# EAGLE board ODU Display (EAGLE 9.6.2)
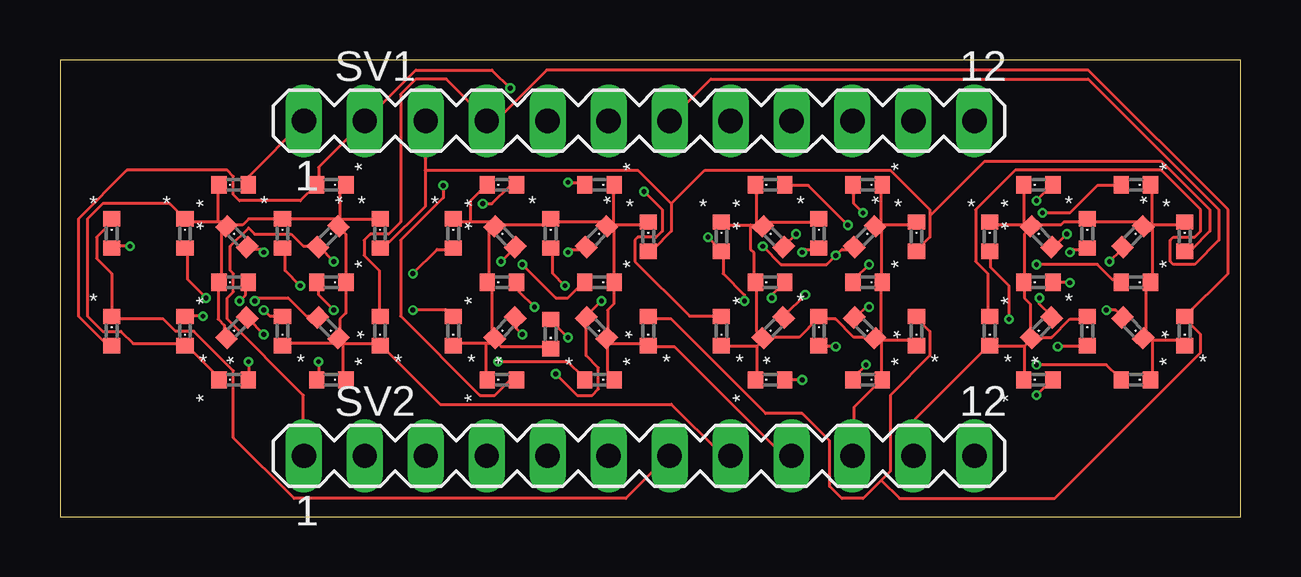
[diagram p0: board, top side]
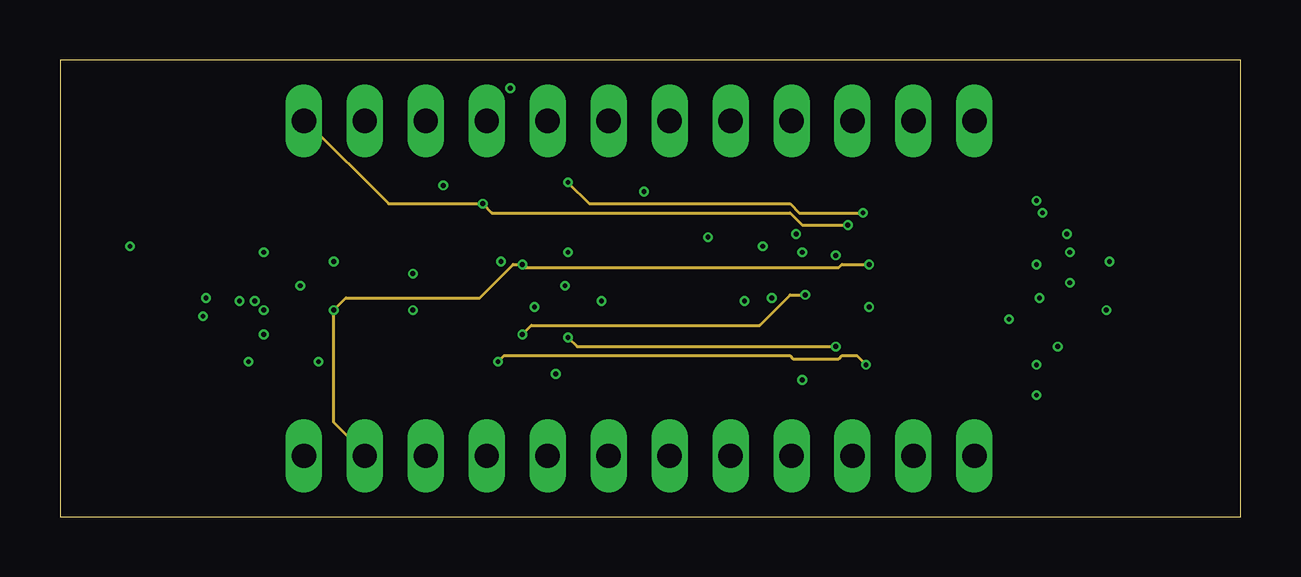
[diagram p1: board, inner layer Route2]
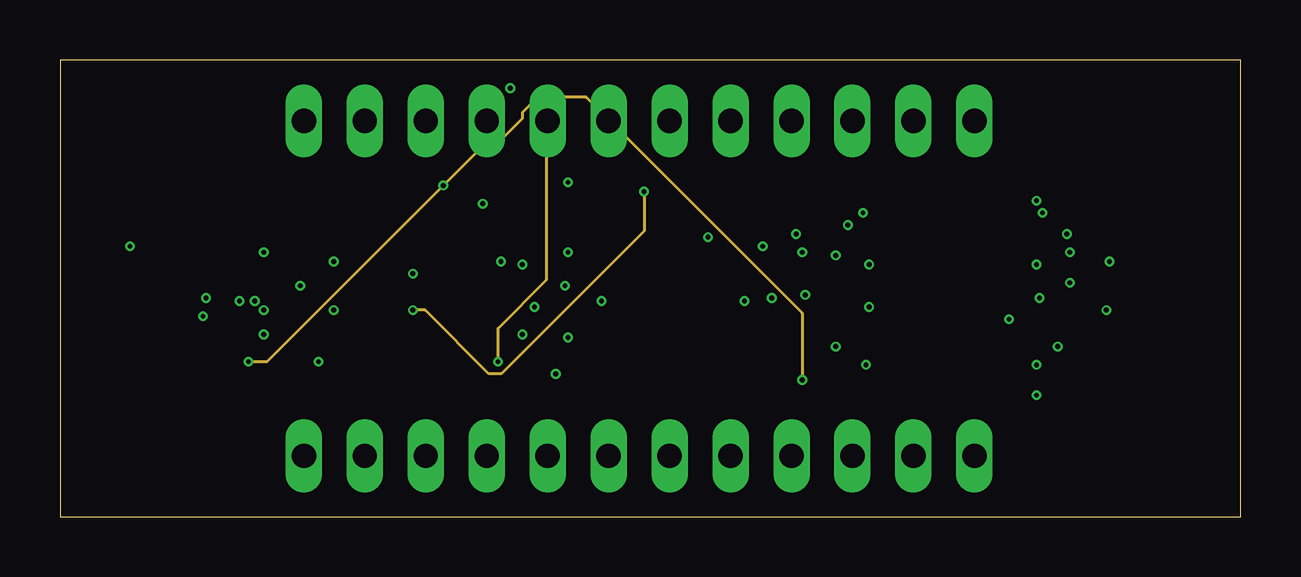
[diagram p2: board, inner layer Route15]
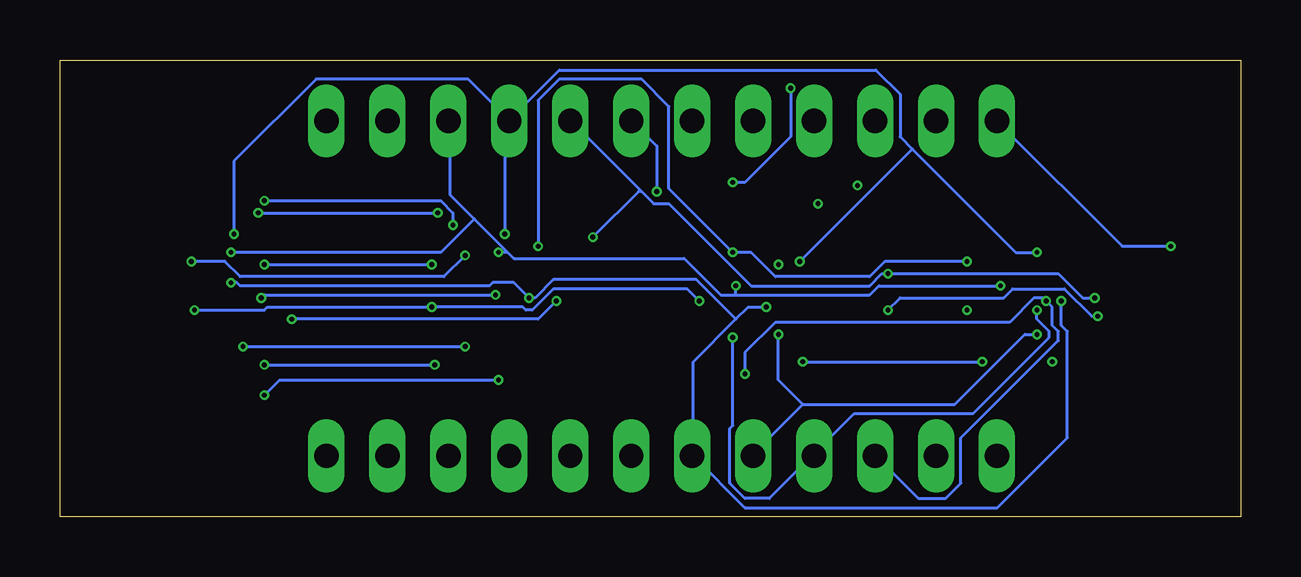
[diagram p3: board, bottom side, seen from below]

Size 49.2 x 19.05 mm. Coordinates in mm from the lower left corner, seen from the top.
Outline: 0,0 49.2,0 49.2,19.05 0,19.05 0,0
Copper layers (1*2*15*16): Top 0.035559375mm / dielectric 0.17018125mm / Route2 0.01778125mm / dielectric 47mil / Route15 0.01778125mm / dielectric 0.17018125mm / Bottom 0.035559375mm
Design rules "jlcpcb-4-layer": minimum track width 5mil, minimum drill 0.2mm, track to track 0.126490625mm, track to pad 0.126490625mm, pad to pad 0.126490625mm, via to via 0.126490625mm, smd to smd 0mil, copper to edge 0.1mm, drill to drill 5mil, minimum pad ring 4mil, minimum via ring 4mil, stop-mask expansion 3mil, vias tented up to drill 100mil, thermal gap 10mil

## Footprints (pad centres in the part's own frame; a part is rotated, then mirrored left to right if it is on the bottom)
CHIPLED_0402 = smd 0.711 x 0.635: A 0,-0.61; C 0,0.61
MA12-1 = drill 1.016 long: 1 -13.97,0; 2 -11.43,0; 3 -8.89,0; 4 -6.35,0; 5 -3.81,0; 6 -1.27,0; 7 1.27,0; 8 3.81,0; 9 6.35,0; 10 8.89,0; 11 11.43,0; 12 13.97,0

## Placement (x,y rotation side)
LED_A1  [CHIPLED_0402]  7.24,13.84 90 top
LED_A2  [CHIPLED_0402]  18.41,13.84 90 top
LED_A3  [CHIPLED_0402]  29.59,13.84 90 top
LED_A4  [CHIPLED_0402]  40.77,13.84 90 top
LED_B1  [CHIPLED_0402]  11.3,13.84 270 top
LED_B2  [CHIPLED_0402]  22.48,13.84 270 top
LED_B3  [CHIPLED_0402]  33.66,13.84 270 top
LED_B4  [CHIPLED_0402]  44.83,13.84 270 top
LED_C1  [CHIPLED_0402]  13.34,11.81 0 top
LED_C2  [CHIPLED_0402]  24.51,11.68 0 top
LED_C3  [CHIPLED_0402]  35.69,11.68 0 top
LED_C4  [CHIPLED_0402]  46.86,11.68 0 top
LED_D1  [CHIPLED_0402]  13.34,7.75 180 top
LED_D2  [CHIPLED_0402]  24.51,7.75 180 top
LED_D3  [CHIPLED_0402]  35.69,7.75 180 top
LED_D4  [CHIPLED_0402]  46.86,7.75 180 top
LED_E1  [CHIPLED_0402]  11.3,5.71 270 top
LED_E2  [CHIPLED_0402]  22.48,5.71 270 top
LED_E3  [CHIPLED_0402]  33.66,5.71 270 top
LED_E4  [CHIPLED_0402]  44.83,5.71 270 top
LED_F1  [CHIPLED_0402]  7.24,5.71 90 top
LED_F2  [CHIPLED_0402]  18.41,5.71 90 top
LED_F3  [CHIPLED_0402]  29.59,5.71 90 top
LED_F4  [CHIPLED_0402]  40.77,5.71 90 top
LED_G1  [CHIPLED_0402]  5.21,7.75 180 top
LED_G2  [CHIPLED_0402]  16.38,7.75 180 top
LED_G3  [CHIPLED_0402]  27.56,7.75 180 top
LED_G4  [CHIPLED_0402]  38.73,7.75 180 top
LED_H1  [CHIPLED_0402]  5.21,11.81 0 top
LED_H2  [CHIPLED_0402]  16.38,11.81 0 top
LED_H3  [CHIPLED_0402]  27.56,11.68 0 top
LED_H4  [CHIPLED_0402]  38.73,11.68 0 top
LED_K1  [CHIPLED_0402]  7.37,11.68 45 top
LED_K2  [CHIPLED_0402]  18.54,11.68 45 top
LED_K3  [CHIPLED_0402]  29.72,11.68 45 top
LED_K4  [CHIPLED_0402]  40.89,11.68 45 top
LED_M1  [CHIPLED_0402]  9.27,11.81 0 top
LED_M2  [CHIPLED_0402]  20.45,11.81 0 top
LED_M3  [CHIPLED_0402]  31.62,11.81 0 top
LED_M4  [CHIPLED_0402]  42.8,11.81 0 top
LED_N1  [CHIPLED_0402]  11.18,11.68 315 top
LED_N2  [CHIPLED_0402]  22.35,11.68 315 top
LED_N3  [CHIPLED_0402]  33.53,11.68 315 top
LED_N4  [CHIPLED_0402]  44.7,11.68 315 top
LED_P1  [CHIPLED_0402]  11.3,9.78 270 top
LED_P2  [CHIPLED_0402]  22.48,9.78 270 top
LED_P3  [CHIPLED_0402]  33.66,9.78 270 top
LED_P4  [CHIPLED_0402]  44.83,9.78 270 top
LED_R1  [CHIPLED_0402]  11.18,7.87 225 top
LED_R2  [CHIPLED_0402]  22.35,7.87 225 top
LED_R3  [CHIPLED_0402]  33.53,7.87 225 top
LED_R4  [CHIPLED_0402]  44.7,7.87 225 top
LED_S1  [CHIPLED_0402]  9.27,7.75 180 top
LED_S2  [CHIPLED_0402]  20.45,7.62 180 top
LED_S3  [CHIPLED_0402]  31.62,7.75 0 top
LED_S4  [CHIPLED_0402]  42.8,7.75 0 top
LED_SEL1  [CHIPLED_0402]  2.16,11.81 0 top
LED_SEL2  [CHIPLED_0402]  2.16,7.75 0 top
LED_T1  [CHIPLED_0402]  7.37,7.87 135 top
LED_T2  [CHIPLED_0402]  18.54,7.87 135 top
LED_T3  [CHIPLED_0402]  29.72,7.87 135 top
LED_T4  [CHIPLED_0402]  40.89,7.87 135 top
LED_U1  [CHIPLED_0402]  7.24,9.78 90 top
LED_U2  [CHIPLED_0402]  18.41,9.78 90 top
LED_U3  [CHIPLED_0402]  29.59,9.78 90 top
LED_U4  [CHIPLED_0402]  40.77,9.78 90 top
SV1  [MA12-1]  24.13,16.51 0 top
SV2  [MA12-1]  24.13,2.54 0 top

## Library data of the parts
LED_A1-LED_A4 LED_B1-LED_B4 LED_C1-LED_C4 LED_D1-LED_D4 LED_E1-LED_E4 LED_F1-LED_F4 LED_G1-LED_G4 LED_H1-LED_H4 LED_K1-LED_K4 LED_M1-LED_M4 LED_N1-LED_N4 LED_P1-LED_P4 LED_R1-LED_R4 LED_S1-LED_S4 LED_SEL1 LED_SEL2 LED_T1-LED_T4 LED_U1-LED_U4 = 000_nl2
SV1 SV2 = con-lstb; OC_FARNELL: unknown; OC_NEWARK: unknown

## Nets
K0: LED_SEL1.C LED_SEL2.C SV2.7
K1: LED_A1.C LED_B1.C LED_C1.C LED_D1.C LED_E1.C LED_F1.C LED_G1.C LED_H1.C LED_K1.C LED_M1.C LED_N1.C LED_P1.C LED_R1.C LED_S1.C LED_T1.C LED_U1.C SV2.8
K2: LED_A2.C LED_B2.C LED_C2.C LED_D2.C LED_E2.C LED_F2.C LED_G2.C LED_H2.C LED_K2.C LED_M2.C LED_N2.C LED_P2.C LED_R2.C LED_S2.C LED_T2.C LED_U2.C SV2.9
K3: LED_A3.C LED_B3.C LED_C3.C LED_D3.C LED_E3.C LED_F3.C LED_G3.C LED_H3.C LED_K3.C LED_M3.C LED_N3.C LED_P3.C LED_R3.C LED_S3.C LED_T3.C LED_U3.C SV2.10
K4: LED_A4.C LED_B4.C LED_C4.C LED_D4.C LED_E4.C LED_F4.C LED_G4.C LED_H4.C LED_K4.C LED_M4.C LED_N4.C LED_P4.C LED_R4.C LED_S4.C LED_T4.C LED_U4.C SV2.11
K5: SV2.12
SEG_A: LED_A1.A LED_A2.A LED_A3.A LED_A4.A LED_SEL1.A SV1.1
SEG_B: LED_B1.A LED_B2.A LED_B3.A LED_B4.A LED_SEL2.A SV1.2
SEG_C: LED_C1.A LED_C2.A LED_C3.A LED_C4.A SV1.3
SEG_D: LED_D1.A LED_D2.A LED_D3.A LED_D4.A SV1.4
SEG_E: LED_E1.A LED_E2.A LED_E3.A LED_E4.A SV1.5
SEG_F: LED_F1.A LED_F2.A LED_F3.A LED_F4.A SV1.6
SEG_G: LED_G1.A LED_G2.A LED_G3.A LED_G4.A SV1.7
SEG_H: LED_H1.A LED_H2.A LED_H3.A LED_H4.A SV1.8
SEG_K: LED_K1.A LED_K2.A LED_K3.A LED_K4.A SV1.9
SEG_M: LED_M1.A LED_M2.A LED_M3.A LED_M4.A SV1.10
SEG_N: LED_N1.A LED_N2.A LED_N3.A LED_N4.A SV2.1
SEG_P: LED_P1.A LED_P2.A LED_P3.A LED_P4.A SV2.2
SEG_R: LED_R1.A LED_R2.A LED_R3.A LED_R4.A SV2.3
SEG_S: LED_S1.A LED_S2.A LED_S3.A LED_S4.A SV2.4
SEG_T: LED_T1.A LED_T2.A LED_T3.A LED_T4.A SV2.5
SEG_U: LED_U1.A LED_U2.A LED_U3.A LED_U4.A SV2.6

## Tracks (layer width: path | path; a pad name or v marks a point on that pad's centre or on a via)
K0
  Top 0.127: LED_SEL1.C 2.15,12.29 1.52,11.66 1.52,10.77 2.15,10.14 LED_SEL2.C 2.28,8.24 4.31,8.24 4.82,7.73 5.58,7.73 7.22,6.08 7.22,3.29 9.76,0.76 23.57,0.76 25.35,2.54 SV2.7
K1
  Top 0.127: LED_F1.C 6.59,5.83 5.32,7.1 LED_G1.C 5.2,7.22 3.04,7.22 2.54,7.73 1.77,7.73 1.14,8.37 1.14,12.42 1.77,13.05 4.56,13.05 5.2,12.42 LED_H1.C 5.32,12.29 6.59,12.29 | LED_K1.C 6.84,12.04 6.72,11.91 6.72,9.89 LED_U1.C 6.59,9.76 6.59,8.24 6.84,7.99 6.84,7.48 LED_T1.C | 6.59,12.29 6.72,12.29 6.84,12.17 LED_K1.C | 6.59,12.29 6.59,13.81 LED_A1.C | LED_S1.C 9.38,7.22 11.41,7.22 11.53,7.35 LED_R1.C | 11.79,7.22 11.79,5.83 LED_E1.C | 11.79,7.22 11.66,7.35 LED_R1.C | 11.79,7.22 13.31,7.22 LED_D1.C 13.44,7.1 15.84,4.69 25.48,4.69 27.5,2.66 27.88,2.66 SV2.8 | 11.79,7.22 LED_R1.C | 11.66,12.42 11.66,13.69 11.79,13.81 LED_B1.C | 11.66,12.42 11.66,12.17 LED_N1.C | 11.66,12.42 9.38,12.42 LED_M1.C 9.25,12.42 7.86,12.42 7.61,12.17 6.97,12.17 LED_K1.C | LED_N1.C 11.66,12.04 11.91,11.79 11.91,9.89 LED_P1.C 11.91,9.76 11.91,8.49 11.66,8.24 11.66,7.48 LED_R1.C | 11.66,12.42 13.31,12.42 LED_C1.C | 11.66,12.42 LED_N1.C
K2
  Top 0.127: 17.74,7.22 17.87,7.22 18,7.35 LED_T2.C | 17.74,7.22 16.48,7.22 LED_G2.C | 17.74,7.22 17.74,5.83 LED_F2.C | LED_S2.C 20.41,7.1 18.38,7.1 18.12,7.35 LED_T2.C | LED_K2.C 18,12.04 17.87,11.91 17.87,9.89 LED_U2.C 17.87,9.76 18,9.63 18,7.48 LED_T2.C | 17.11,12.29 17.87,12.29 18,12.17 LED_K2.C | 17.11,12.29 16.48,12.29 LED_H2.C | 17.11,12.29 17.11,13.18 17.74,13.81 LED_A2.C | 22.81,7.22 22.81,6.08 23.07,5.83 LED_E2.C | 22.81,7.22 22.81,7.35 LED_R2.C | 22.81,7.22 24.46,7.22 LED_D2.C 24.59,7.1 25.6,7.1 30.04,2.66 30.42,2.66 SV2.9 | 22.81,7.22 LED_R2.C | 23.07,12.17 24.46,12.17 LED_C2.C | 23.07,12.17 22.81,12.17 LED_N2.C | LED_N2.C 22.69,12.17 22.56,12.29 20.53,12.29 LED_M2.C 20.41,12.29 20.28,12.17 18.12,12.17 LED_K2.C | 23.07,12.17 23.07,9.89 LED_P2.C 23.07,9.76 23.07,8.87 22.81,8.62 22.81,7.48 LED_R2.C | 23.07,12.17 23.07,13.81 LED_B2.C | 23.07,12.17 LED_N2.C
K3
  Top 0.127: 29.02,7.1 29.02,5.83 LED_F3.C | 29.02,7.1 29.28,7.35 LED_T3.C | 29.02,7.1 27.63,7.1 LED_G3.C | LED_T3.C 29.28,7.48 29.02,7.73 29.02,9.76 LED_U3.C 28.9,9.89 28.9,11.03 28.77,11.15 28.77,12.17 | 28.77,12.17 27.63,12.17 LED_H3.C | 28.77,12.17 29.02,12.17 | 29.02,12.17 29.28,12.17 LED_K3.C | 29.02,12.17 29.02,13.81 LED_A3.C | 29.02,12.17 LED_K3.C | LED_M3.C 31.56,12.29 29.53,12.29 29.41,12.17 LED_K3.C | 34.22,12.17 35.62,12.17 LED_C3.C | 34.22,12.17 33.97,12.17 LED_N3.C 34.22,12.17 | 34.22,12.17 34.22,9.89 LED_P3.C 34.22,9.76 34.22,7.35 | 34.22,12.17 34.22,13.81 LED_B3.C | 34.22,7.35 35.49,7.35 35.62,7.22 LED_D3.C | 34.22,7.35 33.97,7.35 LED_R3.C | 34.22,7.35 34.22,5.83 LED_E3.C 34.22,5.7 33.08,4.56 33.08,2.66 SV2.10 | LED_R3.C 33.84,7.48 33.08,7.48 32.32,8.24 31.69,8.24 LED_S3.C 31.56,8.24 30.8,7.48 29.41,7.48 LED_T3.C | 34.22,7.35 LED_R3.C
K4
  Top 0.127: 40.18,7.1 40.18,5.83 LED_F4.C | 40.18,7.1 40.43,7.35 LED_T4.C | 40.18,7.1 38.78,7.1 LED_G4.C 38.66,7.1 35.62,4.06 35.62,2.66 SV2.11 | LED_S4.C 42.71,8.24 42.08,8.24 41.32,7.48 40.56,7.48 LED_T4.C | LED_K4.C 40.43,12.04 40.18,11.79 40.18,9.89 LED_U4.C 40.18,9.76 40.18,9.13 40.43,8.87 40.43,7.48 LED_T4.C | 40.18,12.17 40.43,12.17 LED_K4.C | 40.18,12.17 38.78,12.17 LED_H4.C | 40.18,12.17 40.18,13.81 LED_A4.C | 40.18,12.17 LED_K4.C | 45.5,7.35 46.64,7.35 46.77,7.22 LED_D4.C | 45.5,7.35 45.25,7.35 LED_R4.C 45.25,7.48 45.25,9.63 45.37,9.76 LED_P4.C 45.5,9.89 45.5,12.17 | 45.5,7.35 45.5,5.83 LED_E4.C | 45.5,12.17 46.77,12.17 LED_C4.C | 45.5,12.17 45.25,12.17 LED_N4.C | LED_N4.C 45.12,12.17 44.99,12.29 42.84,12.29 LED_M4.C 42.71,12.29 41.83,12.29 41.7,12.17 40.56,12.17 LED_K4.C | 45.5,12.17 45.5,13.81 LED_B4.C | 45.5,12.17 LED_N4.C
SEG_A  (via drill 0.2)
  Top 0.127: v32.83,12.17 31.18,13.81 30.29,13.81 LED_A3.A | v40.69,13.18 41.32,13.81 LED_A4.A | v2.92,11.28 2.28,11.28 LED_SEL1.A | LED_A1.A 7.86,13.94 7.86,14.2 10.14,16.48 SV1.1 | v17.62,13.05 18,13.05 18.76,13.81 19.01,13.81 LED_A2.A
  Route2 0.127: SV1.1 10.27,16.48 13.69,13.05 v17.62,13.05 18,12.67 30.42,12.67 30.93,12.17 v32.83,12.17
  Bottom 0.127: v32.83,12.17 32.83,12.67 33.33,13.18 v40.69,13.18 | v2.92,11.28 4.94,11.28 10.14,16.48 SV1.1
SEG_B  (via drill 0.2)
  Top 0.127: LED_SEL2.A 2.15,7.22 1.9,7.22 0.76,8.37 0.76,12.42 2.79,14.45 6.97,14.45 7.22,14.2 7.22,13.44 7.48,13.18 10.01,13.18 10.65,13.81 LED_B1.A 10.77,13.94 10.77,14.58 12.67,16.48 SV1.2 12.8,16.6 14.83,18.63 18,18.63 v18.76,17.87 | v33.46,12.67 33.08,13.05 33.08,13.81 LED_B3.A | v40.94,12.67 42.08,12.67 43.22,13.81 44.11,13.81 LED_B4.A | v21.17,13.94 21.8,13.94 LED_B2.A
  Route2 0.127: v33.46,12.67 30.8,12.67 30.42,13.05 22.05,13.05 v21.17,13.94
  Bottom 0.127: v40.94,12.67 v33.46,12.67 | v21.17,13.94 20.66,13.94 18.76,15.84 v18.76,17.87
SEG_C
  Top 0.127: 15.21,14.45 15.21,16.48 SV1.3 | 15.21,14.45 15.21,12.93 13.56,11.28 13.44,11.28 LED_C1.A | 25.48,13.05 25.48,11.91 24.71,11.15 24.59,11.15 LED_C2.A | 25.48,13.05 24.08,14.45 15.21,14.45 | 36.25,12.55 36.25,12.8 34.6,14.45 26.87,14.45 25.48,13.05 | 36.25,12.55 36.25,11.66 35.74,11.15 LED_C3.A | 36.25,12.55 38.53,14.83 45.88,14.83 47.91,12.8 47.91,11.91 47.15,11.15 46.9,11.15 LED_C4.A
SEG_D
  Top 0.127: LED_D1.A 13.31,8.37 13.31,10.27 12.67,10.9 12.67,11.53 12.93,11.79 13.69,11.79 14.2,12.29 14.2,17.62 14.83,18.25 16.1,18.25 17.74,16.6 SV1.4 17.87,16.6 18.25,16.6 20.28,18.63 42.84,18.63 48.67,12.8 48.67,10.14 46.9,8.37 LED_D4.A 46.9,8.24 47.53,7.61 47.53,6.84 41.45,0.76 34.98,0.76 34.22,1.52 | 34.22,1.52 34.6,1.9 34.6,5.07 36.25,6.72 36.25,7.73 35.74,8.24 LED_D3.A | 34.22,1.52 33.46,0.76 32.57,0.76 32.07,1.27 32.07,3.17 30.93,4.31 29.41,4.31 25.48,8.24 24.59,8.24 LED_D2.A
SEG_E  (via drill 0.2)
  Top 0.127: v33.59,6.34 33.08,5.83 LED_E3.A | v40.69,6.34 43.6,6.34 44.11,5.83 LED_E4.A | v10.77,6.46 10.77,5.83 LED_E1.A | v18.25,6.46 21.17,6.46 21.8,5.83 LED_E2.A
  Route2 0.127: v33.59,6.34 33.21,6.72 32.57,6.72 32.45,6.59 30.55,6.59 30.42,6.72 18.5,6.72 v18.25,6.46
  Route15 0.127: v18.25,6.46 18.25,7.86 20.28,9.89 20.28,16.48 SV1.5
  Bottom 0.127: v40.69,6.34 v33.59,6.34 | v18.25,6.46 v10.77,6.46
SEG_F  (via drill 0.2)
  Top 0.127: v30.93,5.7 30.29,5.7 LED_F3.A | v40.69,5.07 41.32,5.7 LED_F4.A | v7.86,6.46 7.86,5.83 LED_F1.A | v15.97,13.81 15.97,13.31 14.2,11.53 14.2,8.37 17.49,5.07 18.12,5.07 18.76,5.7 LED_F2.A
  Route15 0.127: v7.86,6.46 8.62,6.46 v15.97,13.81 17.62,15.46 18.12,15.46 19.27,16.6 19.27,16.86 19.9,17.49 21.93,17.49 22.81,16.6 SV1.6 22.94,16.48 30.93,8.49 v30.93,5.7
  Bottom 0.127: v30.93,5.7 40.05,5.7 v40.69,5.07
SEG_G  (via drill 0.2)
  Top 0.127: v5.96,8.37 5.32,8.37 LED_G1.A | v14.7,8.62 16.1,8.62 16.35,8.37 LED_G2.A | v24.34,13.56 25.09,12.8 25.09,11.91 24.84,11.66 24.08,11.66 23.95,11.53 23.95,10.65 26.24,8.37 27.5,8.37 LED_G3.A | LED_G4.A 38.66,8.37 38.66,10.14 38.15,10.65 38.15,12.8 39.8,14.45 45.88,14.45 47.53,12.8 47.53,11.91 47.27,11.66 46.39,11.66 46.26,11.53 46.26,10.65 46.39,10.52 47.27,10.52 48.29,11.53 48.29,12.8 42.84,18.25 27.12,18.25 25.48,16.6 SV1.7
  Route15 0.127: v14.7,8.62 15.21,8.62 17.87,5.96 18.38,5.96 24.34,11.91 v24.34,13.56
  Bottom 0.127: v5.96,8.37 6.21,8.37 7.35,9.51 9.51,9.51 9.89,9.13 14.2,9.13 v14.7,8.62 | v24.34,13.56 24.34,15.46 25.35,16.48 SV1.7
SEG_H  (via drill 0.2)
  Top 0.127: v6.08,9.13 5.32,9.89 5.32,11.15 LED_H1.A | v14.7,10.14 15.72,11.15 16.35,11.15 LED_H2.A | v27,11.66 27.5,11.15 LED_H3.A 27.63,11.03 27.63,10.14 28.52,9.25 v28.52,9 | v39.54,8.24 39.54,9.63 38.78,10.39 38.78,11.03 LED_H4.A
  Bottom 0.127: v6.08,9.13 6.59,9.13 7.61,10.14 v14.7,10.14 14.96,10.14 15.46,9.63 20.41,9.63 23.83,13.05 24.46,13.05 24.97,13.56 | 24.97,13.56 27.88,16.48 SV1.8 | v27,11.66 25.09,13.56 24.97,13.56 | v39.54,8.24 29.28,8.24 v28.52,9
SEG_K  (via drill 0.2)
  Top 0.127: v8.49,11.03 8.37,11.15 7.86,11.15 LED_K1.A | v18.38,10.65 18.89,11.15 LED_K2.A | v30.67,11.79 30.16,11.28 LED_K3.A | v41.95,11.79 41.45,11.28 LED_K4.A
  Bottom 0.127: v8.49,11.03 9.38,11.03 13.69,15.34 | 13.69,15.34 14.2,15.84 14.2,17.62 15.21,18.63 28.39,18.63 30.42,16.6 SV1.9 | 13.69,15.34 v18.38,10.65 | v30.67,11.79 30.67,16.35 30.55,16.48 SV1.9 | v41.95,11.79 41.95,14.83 38.53,18.25 32.19,18.25 30.55,16.6 SV1.9
SEG_M  (via drill 0.2)
  Top 0.127: v10.01,9.63 9.38,10.27 9.38,11.15 LED_M1.A | v21.04,9.63 20.53,10.14 20.53,11.15 LED_M2.A | v30.93,11.03 31.05,11.15 31.56,11.15 LED_M3.A | v42.08,11.03 42.21,11.15 42.71,11.15 LED_M4.A
  Bottom 0.127: v10.01,9.63 15.08,9.63 15.46,9.25 21.04,9.25 | 21.04,9.25 21.67,9.25 23.19,10.77 30.29,10.77 30.55,11.03 | 31.94,12.42 32.95,13.44 32.95,16.48 SV1.10 | 31.94,12.42 30.55,11.03 | 21.04,9.25 v21.04,9.63 | 30.55,11.03 v30.93,11.03 | v42.08,11.03 33.33,11.03 31.94,12.42
SEG_N  (via drill 0.2)
  Top 0.127: SV2.1 10.14,2.66 10.14,5.07 6.97,8.24 6.97,9.13 7.22,9.38 7.22,10.14 7.1,10.27 7.1,11.28 7.86,12.04 8.11,11.79 9.63,11.79 10.14,11.28 10.65,11.28 LED_N1.A 10.77,11.28 v11.41,10.65 | v21.17,11.03 21.29,11.15 21.8,11.15 LED_N2.A | v29.28,11.28 30.04,10.52 31.94,10.52 v32.32,10.9 32.57,11.15 33.08,11.15 LED_N3.A | v43.73,10.65 44.23,11.15 LED_N4.A
  Bottom 0.127: v11.41,10.65 14.83,10.65 15.46,10.01 19.39,10.01 20.41,11.03 v21.17,11.03 23.83,13.69 23.83,17.11 24.97,18.25 28.39,18.25 29.28,17.36 v29.28,11.28 | v43.73,10.65 42.33,10.65 41.7,10.01 33.21,10.01 v32.32,10.9
SEG_P  (via drill 0.2)
  Top 0.127: v33.71,10.52 33.08,9.89 LED_P3.A | v40.69,10.52 43.22,10.52 43.85,9.89 44.11,9.89 LED_P4.A | v11.41,8.62 10.77,9.25 10.77,9.76 LED_P1.A | v19.27,10.52 20.66,9.13 21.17,9.13 21.8,9.76 LED_P2.A
  Route2 0.127: SV2.2 12.67,2.66 11.41,3.93 v11.41,8.62 11.91,9.13 17.49,9.13 18.89,10.52 v19.27,10.52 19.39,10.39 32.45,10.39 32.57,10.52 v33.71,10.52
  Bottom 0.127: v40.69,10.52 v33.71,10.52
SEG_R  (via drill 0.2)
  Top 0.127: v33.71,8.74 33.59,8.74 33.21,8.37 LED_R3.A | v43.6,8.62 43.98,8.62 44.23,8.37 LED_R4.A | v8.11,9 8.24,9.13 9.51,9.13 10.27,8.37 10.65,8.37 LED_R1.A | v20.66,5.96 21.55,5.07 22.18,5.07 22.43,5.32 22.43,6.21 21.93,6.72 21.93,8.24 LED_R2.A 21.93,8.37 v22.56,9
  Bottom 0.127: v43.6,8.62 40.69,8.62 40.56,8.74 v33.71,8.74 29.91,8.74 29.79,8.62 29.53,8.62 28.64,9.51 23.07,9.51 v22.56,9 | SV2.3 15.21,2.54 13.44,0.76 12.29,0.76 11.66,1.39 11.66,3.29 7.61,7.35 7.61,7.73 7.86,7.99 7.86,8.74 v8.11,9 8.24,9.13 8.62,9.13 9.63,8.11 19.39,8.11 20.66,6.84 v20.66,5.96
SEG_S  (via drill 0.2)
  Top 0.127: v32.32,7.1 31.69,7.1 LED_S3.A | v41.57,7.1 42.71,7.1 LED_S4.A | v8.49,8.62 8.74,8.37 9.25,8.37 LED_S1.A | v21.17,7.48 20.53,8.11 LED_S2.A
  Route2 0.127: v32.32,7.1 21.55,7.1 v21.17,7.48
  Bottom 0.127: v41.57,7.1 v32.32,7.1 | v8.49,8.62 8.49,8.24 7.99,7.73 7.99,7.48 11.15,4.31 16.1,4.31 17.74,2.66 SV2.4 17.87,2.54 19.64,0.76 20.66,0.76 21.29,1.39 21.29,3.68 21.17,3.8 v21.17,7.48
SEG_T  (via drill 0.2)
  Top 0.127: v31.05,9.25 30.16,8.37 LED_T3.A | v40.81,9.13 40.81,8.87 41.32,8.37 LED_T4.A | v8.49,7.61 7.86,8.24 LED_T1.A | v19.27,7.61 19.01,7.86 19.01,8.24 LED_T2.A
  Route2 0.127: v31.05,9.25 30.42,9.25 29.15,7.99 19.64,7.99 v19.27,7.61
  Bottom 0.127: v31.05,9.25 40.69,9.25 v40.81,9.13 | v8.49,7.61 9,7.61 11.91,4.69 18.25,4.69 | 18.25,4.69 20.28,2.66 SV2.5 | v19.27,7.61 19.27,5.7 18.25,4.69
SEG_U  (via drill 0.2)
  Top 0.127: v7.48,9 7.73,9.25 7.73,9.76 LED_U1.A | v19.77,8.74 19.14,9.38 19.14,9.76 LED_U2.A | v29.66,9.13 29.66,9.25 30.16,9.76 LED_U3.A | v42.08,9.76 41.45,9.76 LED_U4.A
  Bottom 0.127: v7.48,9 7.48,7.99 7.22,7.73 7.22,3.29 10.14,0.38 20.66,0.38 22.81,2.54 SV2.6 22.81,2.66 22.81,6.46 21.04,8.24 | v19.77,8.74 20.53,8.74 21.04,8.24 | 21.04,8.24 22.69,9.89 28.64,9.89 29.41,9.13 v29.66,9.13 30.29,9.76 31.18,9.76 31.31,9.63 41.7,9.63 41.83,9.76 v42.08,9.76